# Altium PCB PCB1.PcbDoc
Units mm, origin at the board's own origin, x right, y up, seen from the top; angles counter-clockwise.
Board outline 200.01 x 161.89 mm, 2 copper layers (Top Layer, Bottom Layer); 51 components, 72 nets, 338 pads, 344 vias.
Unrouted connection lines stored in the file: 61.
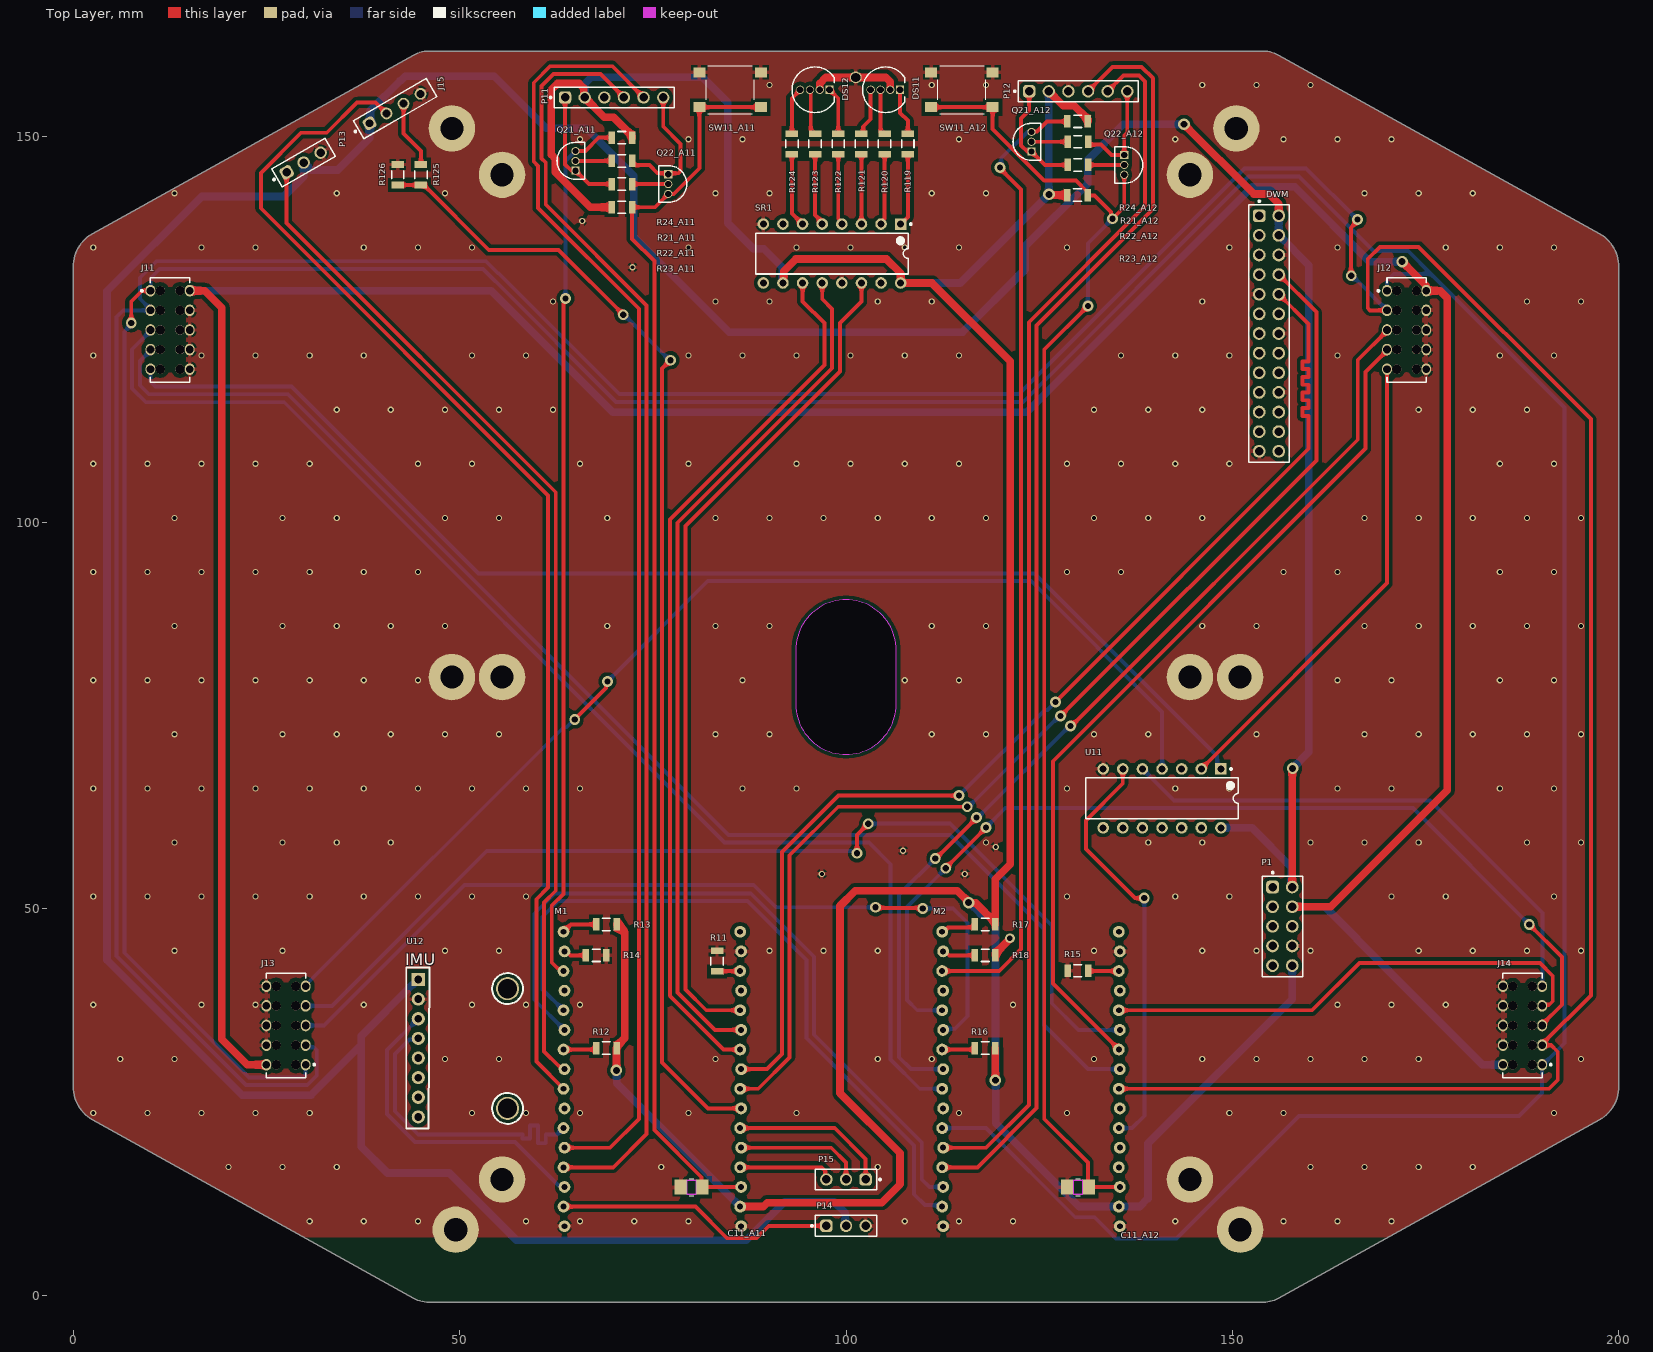
[diagram p0: Top Layer view]
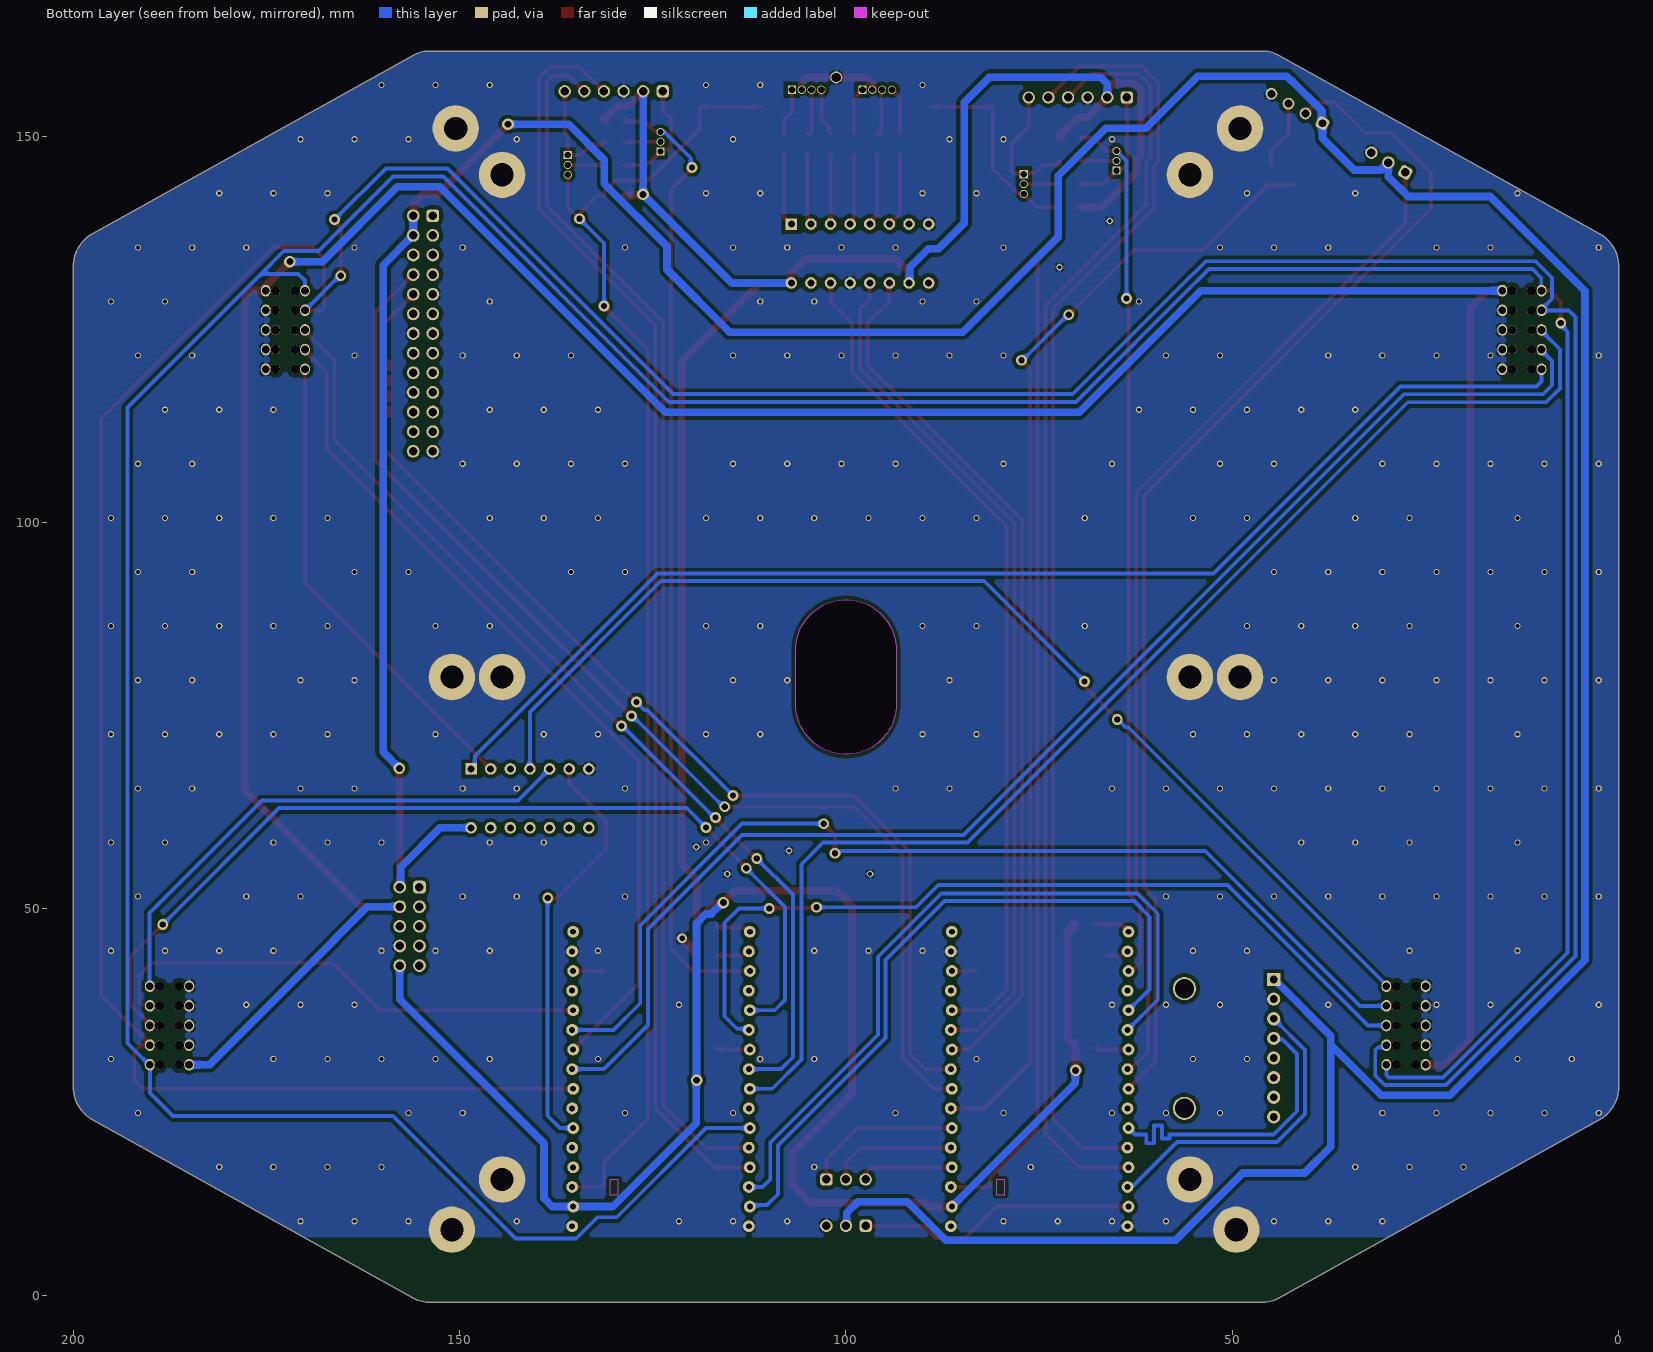
[diagram p1: Bottom Layer view, seen from below]
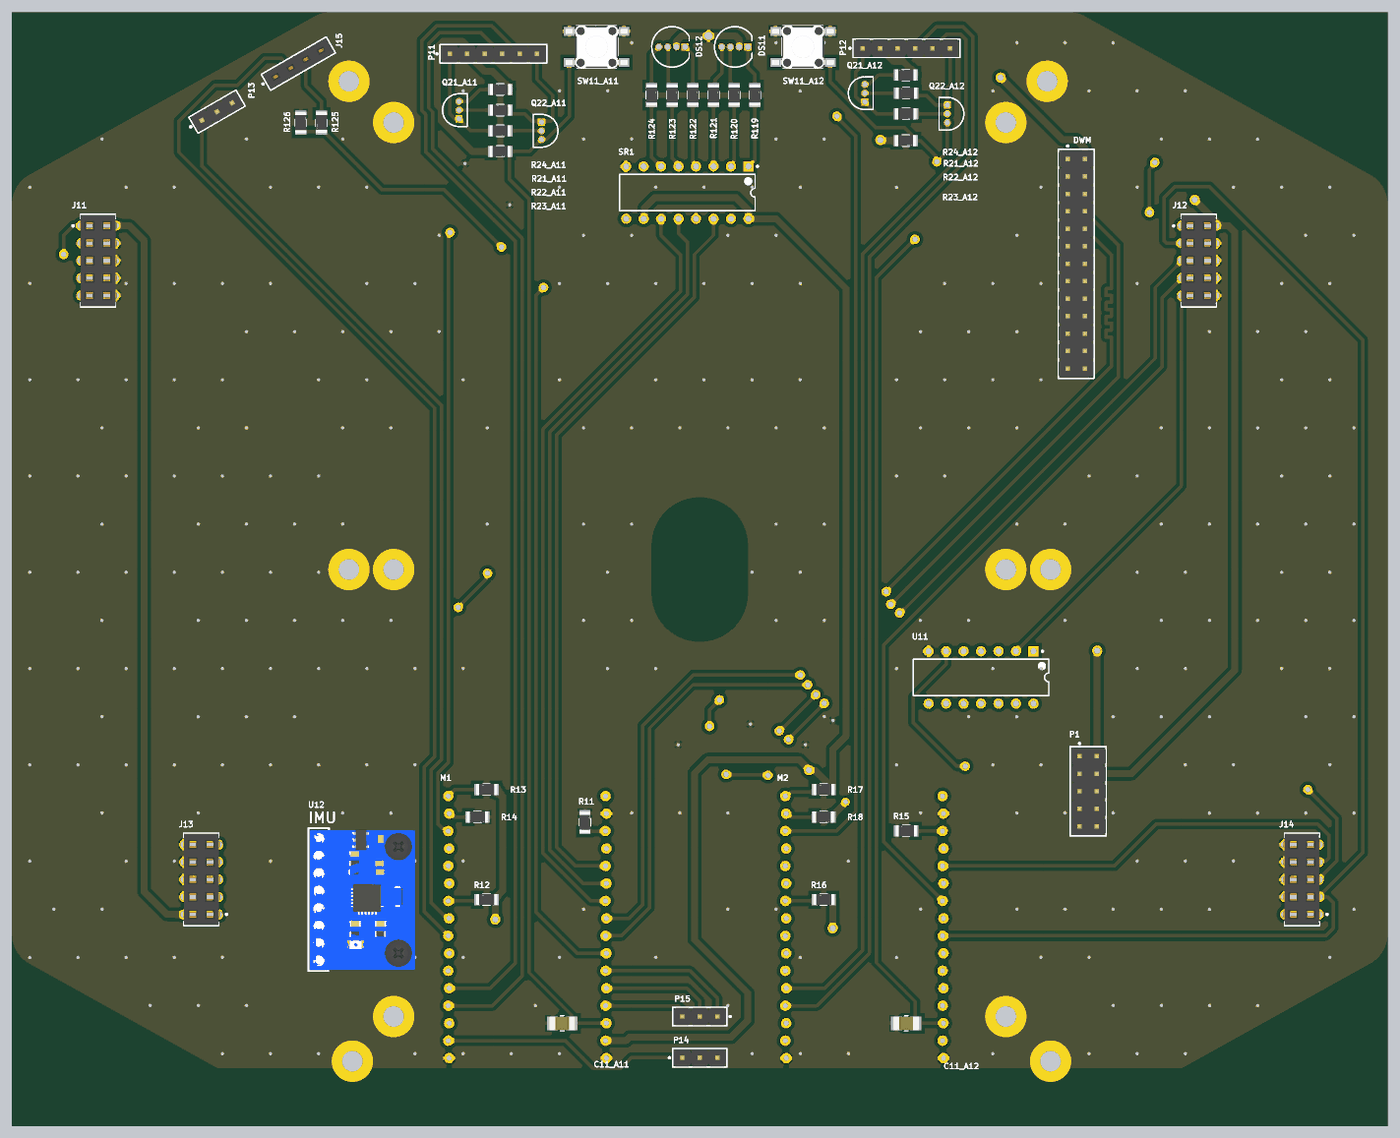
[diagram p2: 3D render of the assembled board from above, using the file's embedded part models]

## Layer stack, top to bottom
Top Solder: solder mask 0.0102, Solder Resist, Dk 3.5
Top Layer: signal copper 0.0356
Dielectric 1: dielectric 0.32, FR-4, Dk 4.8
Bottom Layer: signal copper 0.0356
Bottom Solder: solder mask 0.0102, Solder Resist, Dk 3.5

## Board outline
2.501,22.718 44.037,-0.354 ccw(c46.037,3.11) 46.037,-0.89 153.976,-0.889 ccw(c153.976,3.111) 155.976,-0.354 197.505,22.724 ccw(c195.005,27.054) 200.005,27.054 200.004,27.054 200.004,133.056 ccw(c195.004,133.056) 197.504,137.386 155.971,160.46 ccw(c153.971,156.996) 153.971,160.996 46.04,161 ccw(c46.04,157) 44.04,160.464 2.492,137.386 ccw(c4.992,133.056) -0.008,133.056 -0.006,133.056 0.001,27.048 ccw(c5.001,27.048)
cut-out: 93.5,76.5 ccw(c100,76.5) 100,70 ccw(c100,76.5) 106.5,76.5 106.5,83.5 ccw(c100,83.5) 100,90 ccw(c100,83.5) 93.5,83.5

## Design rules (kind name [scope] priority, off if disabled: settings)
Clearance [All] p1: gap=0.5 ignorepadtopadclearanceinfootprint=FALSE
PlaneConnect [All] p1: planeconnectstyle=Relief reliefexpansion=0.5 reliefentries=4 reliefconductorwidth=0.5 reliefairgap=0.254
PolygonConnect "PolygonConnect MOUNT" [IsPad AND ((AsMM(PadXSize_AllLayers) > 5) OR (AsMM(PadYSize_AllLayers) > 5)) vs InNet('GND')] p1: connectstyle=Direct reliefconductorwidth=0.5 reliefentries=4 polygonreliefangle="90 Angle" airgapwidth=0
PolygonConnect PolygonConnect_1 [All] p2: connectstyle=Relief reliefconductorwidth=0.5 reliefentries=4 polygonreliefangle="90 Angle" airgapwidth=0.254
RoutingVias [All] p1: holewidth=0.711 width=1.27 viastyle="Through Hole" minholewidth=0.711 minwidth=1.27 maxholewidth=0.711 maxwidth=1.27
SolderMaskExpansion [All] p1: expansion=0.102 istentingtop=FALSE
SupplyNets "Schematic Supply Nets_3" [InNet('+3V3')] p1: voltage=0.000
SupplyNets "Schematic Supply Nets_2" [InNet('VBAT')] p2: voltage=0.000
SupplyNets "Schematic Supply Nets_1" [InNet('GND')] p3: voltage=0.000
SupplyNets "Schematic Supply Nets" [InNet('+5')] p4: voltage=0.000
Width Width_power [InNetClass('PWR')] p1: maxlimit=1 minlimit=1 preferedwidth=1
Width Width_1 [All] p2: maxlimit=0.5 minlimit=0.5 preferedwidth=0.5
29 further rules are at their usual default settings.

## Classes and differential pairs
net class PWR: +3V3 +5 GND VBAT
channel class Autoprog: A11 A12
component class Moderkort: DS11 DS12 DWM J11 J12 J13 J14 J15 M1 M2 P1 P11 P12 P13 P14 P15 R11 R12 R13 R14 R15 R16 R17 R18 R119 R120 R121 R122 R123 R124 R125 R126 SR1 U11 U12
component class A12: C11_A12 Q21_A12 Q22_A12 R21_A12 R22_A12 R23_A12 R24_A12 SW11_A12
component class A11: C11_A11 Q21_A11 Q22_A11 R21_A11 R22_A11 R23_A11 R24_A11 SW11_A11

## Components (designator, comment, footprint, x,y, rotation, side; value= is the part's Value field where it differs from the comment)
C11_A11 "1 µF" "1 µF" 80,14 r0 top (schematic designator C11)
C11_A12 "1 µF" "1 µF" 130,14 r0 top (schematic designator C11)
DS11 "WP154A4SUREQBFZGC" KING-WP154A4SUREQBFZGC_V 105.095,156 r270 top
DS12 "WP154A4SUREQBFZGC" KING-WP154A4SUREQBFZGC_V 95.965,156 r270 top
DWM "DWM 1001 DEV" "DWM-1001 DEV" 136.061,124.841 r270 top
J11 "61301025721" 61301025721 12.54,124.92 r270 top locked
J12 "61301025721" 61301025721 172.54,124.92 r270 top locked
J13 "61301025721" 61301025721 27.54,34.92 r90 top locked
J14 "61301025721" 61301025721 187.54,34.92 r90 top locked
J15 "61300411821" 61300411821 41.648,153.568 r30 top
M1 "ESP32 Breakout" "ESP32 Breakout" 75,28 r180 top locked
M2 "ESP32 Breakout" "ESP32 Breakout" 124,28 r180 top locked
P1 "61301021121" 61301021121 156.464,47.752 r270 top
P11 "61300611121" 61300611121 70,155 r0 top
P12 "61300611121" 61300611121 130.048,155.804 r0 top
P13 "61300311121" 61300311121 29.82,146.583 r30 top
P14 "61300311121" 61300311121 100,9 r0 top locked
P15 "61300311121" 61300311121 100,15 r180 top
Q21_A11 "2N3904BU" FAIR-TO-92 65,145.53 r90 top (schematic designator Q21)
Q21_A12 "2N3904BU" FAIR-TO-92 124,148 r90 top (schematic designator Q21)
Q22_A11 "2N3904BU" FAIR-TO-92 77,145.07 r270 top (schematic designator Q22)
Q22_A12 "2N3904BU" FAIR-TO-92 136,147.54 r270 top (schematic designator Q22)
R11 "RT1206BRD07470RL" FP-RT1206-IPC_C 83.312,43.256 r90 top value=10k
R12 "RT1206BRD07470RL" FP-RT1206-IPC_C 69,32 r180 top value=10k
R13 "RT1206BRD07470RL" FP-RT1206-IPC_C 69,48 r180 top value=10k
R14 "RT1206BRD07470RL" FP-RT1206-IPC_C 67.673,44 r0 top value=10k
R15 "RT1206BRD07470RL" FP-RT1206-IPC_C 130,42 r180 top value=10k
R16 "RT1206BRD07470RL" FP-RT1206-IPC_C 118,32 r180 top value=10k
R17 "RT1206BRD07470RL" FP-RT1206-IPC_C 118,48 r180 top value=10k
R18 "RT1206BRD07470RL" FP-RT1206-IPC_C 118,44 r0 top value=10k
R21_A11 "RT1206BRD07470RL" FP-RT1206-IPC_C 71,146.8 r180 top value=10k (schematic designator R21)
R21_A12 "RT1206BRD07470RL" FP-RT1206-IPC_C 130,149.27 r180 top value=10k (schematic designator R21)
R22_A11 "RT1206BRD07470RL" FP-RT1206-IPC_C 71,143.8 r0 top value=10k (schematic designator R22)
R22_A12 "RT1206BRD07470RL" FP-RT1206-IPC_C 130,146.27 r0 top value=10k (schematic designator R22)
R23_A11 "RT1206BRD07470RL" FP-RT1206-IPC_C 71,140.8 r0 top value=10k (schematic designator R23)
R23_A12 "RT1206BRD07470RL" FP-RT1206-IPC_C 129.946,142.367 r0 top value=10k (schematic designator R23)
R24_A11 "RT1206BRD07470RL" FP-RT1206-IPC_C 71,149.8 r180 top value=10k (schematic designator R24)
R24_A12 "RT1206BRD07470RL" FP-RT1206-IPC_C 129.972,151.917 r180 top value=10k (schematic designator R24)
R119 "RT1206BRD07470RL" FP-RT1206-IPC_C 108,149 r90 top value=270
R120 "RT1206BRD07470RL" FP-RT1206-IPC_C 105,149 r90 top value=180
R121 "RT1206BRD07470RL" FP-RT1206-IPC_C 102,149 r90 top value=180
R122 "RT1206BRD07470RL" FP-RT1206-IPC_C 99,149 r90 top value=270
R123 "RT1206BRD07470RL" FP-RT1206-IPC_C 96,149 r90 top value=180
R124 "RT1206BRD07470RL" FP-RT1206-IPC_C 93,149 r90 top value=180
R125 "RT1206BRD07470RL" FP-RT1206-IPC_C 45,145 r270 top value=1k
R126 "RT1206BRD07470RL" FP-RT1206-IPC_C 42,145 r90 top value=2k
SR1 "SN74HC595N" N0016A 98.19,134.81 r270 top
SW11_A11 "430182050816" 430182050816 85,156 r0 top (schematic designator SW11)
SW11_A12 "430182050816" 430182050816 115,156 r0 top (schematic designator SW11)
U11 "SN74LS20N" N0014A 140.894,64.313 r270 top
U12 "MCU6050 breakout board" PCBComponent_1 51,32 r0 top

## Footprints (in the part's own frame and the unit in brackets; to place one, negate y for a bottom-side part, rotate by r counter-clockwise, add the part's x,y. Pads: shape width x height; smd on the part's side, far side on the other; paste and mask are expansions set on the pad)
"1 µF" [mm]
  rect 1.606x1.95 smd paste+0 mask+0: 1(-1.403,0) 2(1.403,0)
  Top Layer keep-out region: -0.549,-0.924 -0.549,0.924 0.549,0.924 0.549,-0.924
  Keep-Out Layer region: -0.549,-0.975 -0.549,0.975 0.549,0.975 0.549,-0.975
  silkscreen extent -0.29,-1.1 0.29,1.1, body extent -1.85,-0.97 1.85,0.97, height 1.85
61300311121 [mm] "Pin Header, pitch 2.54 mm, THT, Vertical, single row, 3p"
  rrect50% 1.6x1.6 hole 1.1: 1(-2.54,0)
  round 1.6 hole 1.1: 2(0,0) 3(2.54,0)
  silkscreen extent -4.53,-1.35 3.96,1.35, body extent -3.81,-1.27 3.81,1.27, height 8.57
61300411821 [mm] "Socket Header, Pitch 2.54 mm, THT, Vertical, single row, 4p"
  rrect50% 1.52x1.52 hole 1.02: 1(-3.81,0)
  round 1.52 hole 1.02: 2(-1.27,0) 3(1.27,0) 4(3.81,0)
  silkscreen extent -6.06,-1.35 5.46,1.35, body extent -5.33,-1.25 5.33,1.25, height 8.55
61300611121 [mm] "Pin Header, pitch 2.54 mm, THT, Vertical, single row, 6p"
  rrect50% 1.6x1.6 hole 1.1: 1(-6.35,0)
  round 1.6 hole 1.1: 2(-3.81,0) 3(-1.27,0) 4(1.27,0) 5(3.81,0) 6(6.35,0)
  silkscreen extent -8.34,-1.35 7.77,1.35, body extent -7.62,-1.27 7.62,1.27, height 8.57
61301021121 [mm] "Pin Header, pitch 2.54 mm, THT, Vertical, dual row, 10p"
  rrect50% 1.65x1.65 hole 1.1: 1(-5.08,-1.27)
  round 1.65 hole 1.1: 2(-5.08,1.27) 3(-2.54,-1.27) 4(-2.54,1.27) 5(0,-1.27) 6(0,1.27) 7(2.54,-1.27) 8(2.54,1.27) 9(5.08,-1.27) 10(5.08,1.27)
  silkscreen extent -7.08,-2.62 6.5,2.62, body extent -6.35,-2.54 6.35,2.54, height 8.59
61301025721 [mm] "Dual Socket Header Bottom Entry, pitch 2.54mm, 10p"
  oval 1.5x1.25 hole 1: 1(-5.08,-2.54) 2(-5.08,2.54) 3(-2.54,-2.54) 4(-2.54,2.54) 5(0,-2.54) 6(0,2.54) 7(2.54,-2.54) 8(2.54,2.54) 9(5.08,-2.54) 10(5.08,2.54)
  round 1.2 hole 1.2 unplated: MH1(-5.08,-1.27) MH2(-5.08,1.27) MH3(-2.54,-1.27) MH4(-2.54,1.27) MH5(0,-1.27) MH6(0,1.27) MH7(2.54,-1.27) MH8(2.54,1.27) MH9(5.08,-1.27) MH10(5.08,1.27)
  silkscreen extent -6.75,-3.77 6.75,2.54, body extent -6.65,-2.66 6.65,2.67, height 5.05
430182050816 [mm] "SMD Tact Switch, body 6x6mm"
  rect 1.55x1.3 smd: A1(-3.975,2.25) A2(3.975,2.25) B1(-3.975,-2.25) B2(3.975,-2.25)
  silkscreen extent -3.1,-3.1 3.1,3.1, body extent -4.5,-3.1 4.5,3.1, height 5
"DWM-1001 DEV" [mm] "Pin Header, pitch 2.54 mm, THT, Vertical, dual row, 26p"
  rrect50% 1.65x1.65 hole 1.1: 1(-14.859,17.399)
  round 1.65 hole 1.1: 2(-14.859,19.939) 3(-12.319,17.399) 4(-12.319,19.939) 5(-9.779,17.399) 6(-9.779,19.939) 7(-7.239,17.399) 8(-7.239,19.939) 9(-4.699,17.399) 10(-4.699,19.939) 11(-2.159,17.399) 12(-2.159,19.939) 13(0.381,17.399) 14(0.381,19.939) 15(2.921,17.399) 16(2.921,19.939) 17(5.461,17.399) 18(5.461,19.939) 19(8.001,17.399) 20(8.001,19.939) 21(10.541,17.399) 22(10.541,19.939) 23(13.081,17.399) 24(13.081,19.939) 25(15.621,17.399) 26(15.621,19.939)
  silkscreen extent -16.86,16.05 17.04,21.28, body extent -16.13,16.13 16.89,21.21, height 8.59
"ESP32 Breakout" [mil]
  round 60 hole 30: 1(-450,750) 2(-445,650) 3(-450,550) 4(-445,450) 5(-450,350) 6(-445,250) 7(-450,150) 8(-445,50) 9(-450,-50) 10(-445,-150) 11(-450,-250) 12(-445,-350) 13(-450,-450) 14(-445,-550) 15(-450,-650) 16(-445,-750) 23(455,-750) 24(450,-650) 25(455,-550) 26(450,-450) 27(455,-350) 28(450,-250) 29(455,-150) 30(450,-50) 31(455,50) 32(450,150) 33(455,250) 34(450,350) 35(455,450) 36(450,550) 37(455,650) 38(450,750)
FAIR-TO-92 [mm] "TO, 3-Leads, Body Dia 4.79mm, Pitch 1.27mm"
  rect 1.05x1.05 hole 0.8 mask+0.05: 1(0,0)
  round 1.05 hole 0.8 mask+0.05: 2(1.27,0) 3(2.54,0)
  silkscreen extent -1.11,-1.21 3.65,2.4, body extent -1.11,-1.21 3.65,2.4, height 5.33
FP-RT1206-IPC_C [mm]
  rect 0.858x1.612 smd paste+0 mask+0: 1(-1.327,0) 2(1.327,0)
  silkscreen extent -0.52,-0.8 0.52,0.8, body extent -1.86,-0.95 1.86,0.95, height 0.25
KING-WP154A4SUREQBFZGC_V [mm] "THD, 4-Leads, Dia 5.9mm, Pitch 1.27mm"
  rect 1.07x1.07 hole 0.889 paste-2539.97: 1(0,1.905)
  round 1.07 hole 0.889 paste-2539.97: 2(0,0.635) 3(0,-0.635) 4(0,-1.905)
  silkscreen extent -2.95,-2.95 2.95,2.5
N0014A [mm] "DIP, 14-Leads, Body 19.7x6.6mm, Pitch 2.54mm"
  rect 1.5x1.5 hole 0.9: 1(-3.81,7.62)
  round 1.5 hole 0.9: 2(-3.81,5.08) 3(-3.81,2.54) 4(-3.81,0) 5(-3.81,-2.54) 6(-3.81,-5.08) 7(-3.81,-7.62) 8(3.81,-7.62) 9(3.81,-5.08) 10(3.81,-2.54) 11(3.81,0) 12(3.81,2.54) 13(3.81,5.08) 14(3.81,7.62)
  silkscreen extent -3.93,-9.85 2.65,9.85, body extent -3.95,-9.85 3.95,9.85, height 5.08
N0016A [mm] "DIP, 16-Leads, Body 19.7x6.6mm, Pitch 2.54mm"
  rect 1.5x1.5 hole 0.9: 1(-3.81,8.89)
  round 1.5 hole 0.9: 2(-3.81,6.35) 3(-3.81,3.81) 4(-3.81,1.27) 5(-3.81,-1.27) 6(-3.81,-3.81) 7(-3.81,-6.35) 8(-3.81,-8.89) 9(3.81,-8.89) 10(3.81,-6.35) 11(3.81,-3.81) 12(3.81,-1.27) 13(3.81,1.27) 14(3.81,3.81) 15(3.81,6.35) 16(3.81,8.89)
  silkscreen extent -3.93,-9.85 2.65,10.32, body extent -3.95,-9.85 3.95,9.85, height 5.08
PCBComponent_1 [mm]
  rect 1.7x1.7 hole 1: 1(-6.347,8.876)
  round 1.7 hole 1: 2(-6.347,6.336) 3(-6.347,3.796) 4(-6.347,1.256) 5(-6.347,-1.284) 6(-6.347,-3.824) 7(-6.347,-6.364) 8(-6.347,-8.904)
  round 3 hole 2.5: ""(5.203,-7.804) ""(5.203,7.696)
  silkscreen extent -7.9,-10.4 7.2,10.4, body extent -7.65,-10.2 7.6,10.17, height 14.67

## Part data
C11_A11 C11_A12: library part CMP-001-00197-1, "SMD Auto X7R Flex, Ceramic, 1 uF, 20%, 25 VDC, X7R, SMD, MLCC, FT-CAP, Automotive Grade, 1206", Manufacturer_Name=Kemet, Manufacturer_Part_Number=C1206X105M3RACAUTO, Component Type=Standard, Copyright="Copyright (C) 2025 Ultra Librarian. All rights reserved.", Design Item ID="1 µF", Pins=2, Source=1MicroF.SchLib
DS11 DS12: library part CMP-2000-07415-1, "Full Color LED Lamp, Dominant Wavelength RGB 630 / 525 / 465 nm, -40 to 85 degC, 4-Pin THD, RoHS", Color=Red,Green,Blue(RGB), Current - Test=20mA, Manufacturer=Kingbright, Millicandela Rating=1300mcdRed,1700mcdGreen,900mcdBlue, Package / Case=Radial-4Leads, Package Description="4-Pin Through Hole LED, Dia 5.9 mm, Pitch 1.27 mm", Standard Package=500, Voltage - Forward (Vf) (Typ)=1.9VRed,3.3VGreen,3.3VBlue, 3D Model="WP154A4SUREQBFZGW.sldprt /  / WP154A4SUREQBFZGW.pro /  / WP154A4SUREQBFZGW.igs /  / WP154A4SUREQBFZGW.stp", Category=Optoelectronics, Datasheet URL=https://www.kingbrightusa.com/images/catalog/spec/WP154A4SUREQBFZGC.pdf, Datasheet Version="Rev. 5A, 08/2014", Family=LEDIndication-Discrete, Height=8.60mm, Lens Style/Size=RoundwithDomedTop,5mm,T-13/4, Lens Type=Clear, Manufacturer URL=http://www.kingbright.com/, Mounting Technology=ThroughHole, Mounting Type=ThroughHole, Online Catalog=5mm,T-13/4(RGB)RoundwithDomedTopLEDLamp, Other Names="754-1615 / WP154A4SUREQBFZGC-ND", Package Reference=WP154A4SUREQBFZGC, Packaging=Bulk, Viewing Angle=50°, Wavelength - Dominant=630nm,525nm,465nm, Wavelength - Peak=645nm,515nm,460nm
J11 J12 J13 J14: library part CMP-1502-01335-4, "THT Vertical Socket Header WR-PHD, Pitch 2.54 mm, Dual Row, 10 pins", Contact Resistance=20mΩ, Current Rating=3A, Operating Supply Voltage=250V, Gender=Female, Lead Pitch=2.54mm, Number of Pins=10, Orientation=Vertical
J15: library part CMP-1502-01316-4, "THT Vertical Socket Header WR-PHD, Pitch 2.54 mm, Single Row, 4 pins", Contact Resistance=20mΩ, Current Rating=3A, Operating Supply Voltage=250V, Gender=Female, Lead Pitch=2.54mm, Number of Pins=4, Orientation=Vertical
P1: library part CMP-002-00636-1, "WR-PHD Pin Header, THT, Vertical, pitch 2.54mm, 2 Row, 10P", Contact Resistance=20mOhm, Manufacturer="Wurth Elektronik", Operating Temperature Max=105°C, Operating Temperature Min=-40°C, Rated Current=3A, Withstanding Voltage=500V, Working Voltage=250V, Category="Board-to-Board Connectors", Component Type=Standard, ComponentLink1Description="Website Link", ComponentLink1URL=https://www.we-online.com/redexpert/article/61301021121?ad, ComponentLink2Description="Datasheet Link", ComponentLink2URL=https://www.we-online.com/redexpert/spec/61301021121?ad, Design Item ID=61301021121, Gender="Pin Header", Manufacturer Part Number=61301021121, Match Code=WR-PHD, Mount="Through Hole", Number of Rows=2, Orientation=Vertical, Packaging=Bag, Pin Count=10, Pins=10, Pitch=2.54mm, Source=WR-PHD.SchLib
P11 P12: library part CMP-1502-01070-4, "THT Vertical Pin Header WR-PHD, Pitch 2.54 mm, Single Row, 6 pins", Color=Black, Contact Resistance=20mΩ, Current Rating=3A, Max Operating Temperature=105°C, Min Operating Temperature=-40°C, Operating Supply Voltage=250V, Connector Type="Male Pin", Contact Gender=Male, Contact Material=Gold, Contact Mating Length=5.9944mm, Contact Plating=Gold, Gender=Male, Height=8.89mm, Housing Material=PBT, Lead Free="Lead Free", Lead Pitch=2.54mm, Mount="Through Hole", Number of Contacts=6, Number of Pins=6, Number of Positions=6, Number of Rows=1, Orientation=Vertical, Packaging=Bulk, Pitch=2.54mm, RoHS=Compliant, Termination="Through Hole", Voltage Rating=250V
P13 P14 P15: library part CMP-1502-01062-4, "THT Vertical Pin Header WR-PHD, Pitch 2.54 mm, Single Row, 3 pins", Color=Black, Contact Resistance=20mΩ, Current Rating=3A, Max Operating Temperature=105°C, Min Operating Temperature=-40°C, Operating Supply Voltage=250V, Connector Type="Male Pin", Contact Material=Gold, Contact Mating Length=5.9944mm, Contact Plating=Gold, Gender=Male, Height=8.94mm, Lead Free="Lead Free", Lead Pitch=2.54mm, Mount="Through Hole", Number of Contacts=3, Number of Pins=3, Number of Positions=3, Number of Rows=1, Orientation=Vertical, Packaging=Bulk, Pitch=2.54mm, RoHS=Compliant, Termination=Solder, Voltage Rating=250V
Q21_A11 Q21_A12 Q22_A11 Q22_A12: library part CMP-2000-04944-1, "NPN General-Purpose Amplifier, 40 V VCEO, 0.2 A, -55 to 150 degC, 2-Pin TO-92, RoHS, Bulk", Manufacturer=FairchildSemiconductor, Maximum Collector Base Voltage=60V, Maximum Collector Emitter Saturation Voltage=0.2@1mA@10mA, Maximum Collector Emitter Voltage=40V, Maximum DC Collector Current=0.2A, Maximum Operating Frequency=300(Min)MHz, Maximum Power Dissipation=625mW, Minimum DC Current Gain=40@0.1mA@1V, Operating Temperature=-55to150degC, Package=3TO-92, Package Description="3-Pin Transistor Outline Package, Body Dia 4.79 mm, Pitch 1.27 mm", Package Reference=TO-92, Category=GPBJT, Datasheet URL=https://datasheet.ciiva.com/4722/2n3904-82270-4722369.pdf, Datasheet Version="Rev. 1.1.0, 10/2014", Manufacturer URL=https://www.fairchildsemi.com/, Mounting=ThroughHole, Packaging=Bulk, Pin Count=3, Rad Hard=No, Type=NPN
R11 R12 R13 R14 R15 R16 R17 R18 R21_A11 R21_A12 R22_A11 R22_A12 R23_A11 R23_A12 R24_A11 R24_A12 R119 R120 R121 R122 R123 R124 R125 R126: library part CMP-009-00218-1, "Fixed Resistor, Thin Film, 0.25W, 470ohm, 200V, 0.1% +/-Tol, 25ppm/Cel, Surface Mount, 1206", Case/Package=1206, Max Operating Temperature=155°C, Min Operating Temperature=-55°C, Package Height=0.55mm, Package Length=3.1mm, Package Width=1.6mm, Power=250mW, Rated Temperature=70°C, Resistor Type="FIXED RESISTOR", Temperature Coefficient (ppm/Cel)=25, Tolerance=0.1%, Working Voltage=200V, Additional Feature="HIGH PRECISION", Construction=Chip, Mounting Technology="Surface Mount", Packaging="Tape and Reel", Pins=2, Reach SVHC Compliant=Yes, RoHS Compliant=Yes, Technology="THIN FILM", Termination=Wraparound
SR1: library part CMP-0780-00137-3, "8-Bit Shift Registers With 3-State Output Registers, N0016A, TUBE", F @ Nom Voltage(Max)(Mhz)=28, Generic Part Number=SN74HC595, ICC @ Nom Voltage(Max)(mA)=0.08, Manufacturer="Texas Instruments", Operating Temperature Range(C)="-40 to 85", Rating=Military, tpd @ Nom Voltage(Max)(ns)=34, Voltage(Nom)(V)=6, 3-State Output=Yes, Bits=8, Code_JEDEC=MS-001, DatasheetVersion=SCLS041H, Input Type=CMOS, Output Drive (IOL/IOH)(Max)(mA)=7.8/-7.8, Output Type=CMOS, PackageReference=N0016A, PackageVersion=http://www.ti.com/lit/ml/mpdi002c/mpdi002c.pdf, Technology Family=HC, VCC(Max)(V)=6, VCC(Min)(V)=2
SW11_A11 SW11_A12: library part CMP-1452-00014-10, "Switch Tactile N.O. SPST Round Button Gull Wing 0.05A 12VDC 1000000Cycles 1.57N SMD Reel", Color=Black, Contact Current Rating=50mA, Contact Resistance=100mΩ, Insulation Resistance=100MΩ, Max Operating Temperature=85°C, Min Operating Temperature=-40°C, Voltage Rating=12V, Actuator Length=1.6mm, Actuator Material="Liquid Crystal Polymer, Polymer", Contact Material="Stainless Steel, Steel", Contact Plating=Silver, Current Rating=50mA, Diameter=3.5mm, Height=5mm, Illumination Type="Illuminated, Non-Illuminated", Lead Free="Lead Free", Length=6.2mm, Life (Cycles)=1Mcycles, Mechanical Life=1Mcycles, Mount="Surface Mount", Packaging="Tape and Reel", REACH SVHC=No, RoHS=Compliant, Switch Function=Off-Mom, Switch Travel=250µm, Termination="Gull Wing", Throw Configuration=SPST, Voltage Rating (DC)=12V, Width=6.2mm
U11: library part CMP-1627-00458-2, "Dual 4-input positive-NAND gates, N0014A, TUBE", F @ Nom Voltage(Max)(Mhz)=35, Generic Part Number=SN74LS20, ICC @ Nom Voltage(Max)(mA)=0.011, Manufacturer="Texas Instruments", Operating Temperature Range(C)="0 to 70", Rating=Catalog, tpd @ Nom Voltage(Max)(ns)=22, Voltage(Nom)(V)=5, Bits(#)=2, Code_JEDEC=MS-001, DatasheetVersion=SDLS079, Input Type=TTL, Output Drive (IOL/IOH)(Max)(mA)=0.4/-16, Output Type=TTL, PackageReference=N0014A, Schmitt Trigger=No, Technology Family=LS, VCC(Max)(V)=5.25, VCC(Min)(V)=4.75
U12: library part IMU

## Free pads (board coordinates)
  round 1.524 hole 1.2: 3(101.272,157.6)
  round 6 hole 3 mask+0: ""(49,80) ""(49,151) ""(49.5,8.5) ""(55.5,15) ""(55.5,80) ""(55.5,145) ""(144.5,80) ""(144.5,15) ""(144.5,145) ""(150.5,151) ""(151,8.5) ""(151,80)

## Via types
v1: diameter 0.8, hole 0.5, Top Layer to Bottom Layer, tented both sides, 310 vias
v2: diameter 1.4, hole 0.8, Top Layer to Bottom Layer, 26 vias
v3: diameter 1.5, hole 0.9, Top Layer to Bottom Layer, 7 vias
v4: diameter 1.27, hole 0.711, Top Layer to Bottom Layer, 1 vias

## Nets (pads, with @x,y where several pads share a name; then routed paths per layer and width w, separated by ;. In a path a pad name is that pad's centre, name@x,y a point inside that pad or via, vN(x,y) a via of type N, cw(c..) or ccw(c..) an arc to the next point about the centre after c; other vN are vias at no path point)
+3V3: M1.2 M2.2 P1.10 P11.2 P12.2 R12.1 R13.1 R16.1 R17.1 R23_A11.1 R23_A12.1 R24_A11.1 R24_A12.1 SR1.10 SR1.16 | length 466.1
  Top Layer w1: R23_A11.1@69.602,140.796 66.925,140.796 62.4,145.321 62.4,147.085 61.85,147.635 61.85,155.98 62.67,156.8 65.489,156.8 66.075,156.214 66.075,155.115 P11.2 66.19,154.994 68.731,152.454 69.908,152.454 72.327,150.035 R24_A11.1 ; v3(70.282,29.108) 70.304,29.131 70.304,31.977 R12.1 ; R13.1 70.398,47.929 70.398,47.694 70.633,47.694 71.374,46.953 71.374,33.282 R12.1@70.398,32.306 ; M1.2 89.29,11.49 89.8,12 104.6,12 107,14.4 107,18.4 99.222,26.178 99.222,50.378 101.209,52.364 114.409,52.364 115.875,50.898 v3(115.875,50.825) 115.926,50.774 116.788,50.774 R17.1@119.327,48.235 ; SR1.10 91.936,131.096 91.936,132.525 93.497,134.087 105.232,134.087 107.08,132.239 SR1.16 111.113,131 121.26,120.853 121.26,55.778 119.327,53.846 R17.1@119.327,48.235 ; R16.1 119.328,31.999 v3(119.329,27.838) v3(119.329,27.838) ; R17.1 R17.1@119.327,48.235 ; P12.2 126.238,155.798 128.122,153.914 129.537,153.914 131.299,152.153 R24_A12.1 ; v3(126.263,142.469) 126.336,142.469 126.438,142.367 R23_A12.1
  Bottom Layer w1: P11.2 66.19,156.766 67.056,157.632 81.432,157.632 84.709,154.356 84.709,138.76 88.036,135.433 89.357,135.433 91.744,133.046 91.744,131.096 SR1.10 ; v3(70.282,29.108) 70.333,29.057 70.333,27.46 M1.2 ; SR1.16 114.795,131 v3(126.263,142.469) 126.251,142.481 126.251,155.791 P12.2 ; v3(115.875,50.825) 115.948,50.825 117.414,49.36 118.128,49.36 119.329,48.158 v3(119.329,27.838) 119.381,27.787 119.381,22.275 130.166,11.49 M2.2 138.007,11.49 139.065,12.548 139.065,19.66 157.734,38.329 P1.10
+5: DWM.2 DWM.4 J15.1 P1.2 P13.2 P14.2 U11.14 U12.1 | length 535.2
  Top Layer w1: v3@143.79,151.485 152.756,142.519 154.711,142.519 156,141.231 DWM.2 ; P1.2 157.734,68.148 v3(157.785,68.199)
  Bottom Layer w1: U12.1 43.963,40.186 43.887,40.186 37.26,33.559 37.26,32.408 ; P14.2 99.885,9.115 99.885,10.681 98.45,12.116 92.088,12.116 87.109,7.137 57.363,7.137 48.671,15.829 40.671,15.829 37.26,19.24 37.26,32.408 ; v3(143.739,151.536) 135.89,151.536 131.267,146.914 131.267,143.84 123.165,135.738 123.165,132.74 115.062,124.638 84.912,124.638 72.549,137.001 72.549,144.849 66.37,151.028 61.214,151.028 54.483,157.759 42.951,157.759 42.367,157.175 42.301,157.175 38.438,153.312 38.438,151.753 J15.1 38.349,149.731 34.236,145.618 30.785,145.618 P13.2 29.82,144.755 27.254,142.189 16.637,142.189 4.369,129.921 4.369,43.409 21.869,25.908 30.759,25.908 37.26,32.408 ; U11.14 152.527,60.503 157.61,55.42 157.61,52.956 P1.2 ; DWM.2 DWM.4 156.041,137.16 159.893,133.308 159.893,70.307 v3(157.785,68.199)
"BOOT A11": M1.25 Q21_A11.3 R24_A11.2 | length 113.6
  Top Layer w0.5: M1.25 63.166,41.97 62.803,42.333 62.667,42.333 61.931,43.069 61.931,50.431 63.443,51.943 63.443,128.264 63.531,128.352 63.531,128.834 v2(63.703,129.007) ; Q21_A11.3 66.27,148.07 68,149.8 R24_A11.2
  Bottom Layer w0.5: v2(63.703,129.007) 63.703,146.773 Q21_A11.3
"BOOT A12": M2.25 Q21_A12.3 R24_A12.2 | length 125.5
  Top Layer w0.5: M2.25 119.821,41.97 122.657,44.806 122.657,143.095 119.939,145.812 v2(119.939,145.923) ; Q21_A12.3 124.078,150.618 124.725,150.618 126,151.893 128.494,151.893 128.673,152.072 R24_A12.2@128.673,152.27
  Bottom Layer w0.5: v2(119.939,145.923) 120.086,146.07 120.086,147.159 123.472,150.545 Q21_A12.3@123.8,150.545
CRANE_SERV: M1.37 P14.1 | length 36.3
  Top Layer w0.5: M1.37 80.51,11.49 84.562,7.438 88.438,7.438 90,9 P14.1
"DRV_DIR 1": J11.7 M2.9 | length 175.9
  Bottom Layer w0.5: J11.7 10,122.255 8.625,120.88 8.625,117.765 9.788,116.602 27.786,116.602 84.802,59.586 113.464,59.586 125.619,47.431 125.619,34.985 131.334,29.27 M2.9
"DRV_DIR 2": J12.7 M2.10 | length 112
  Top Layer w0.5: M2.10 126.771,40.342 126.771,69.113 167.234,109.576 167.234,119.489 170,122.255 J12.7
"DRV_DIR 3": J13.7 M2.11 | length 133.7
  Top Layer w0.5: v2(101.422,57.201) 101.422,59.588 v2(102.87,61.036)
  Bottom Layer w0.5: J13.7 33.472,37.46 53.512,57.5 100.679,57.5 100.806,57.373 101.25,57.373 v2(101.422,57.201) ; v2(102.87,61.036) 113.462,61.036 126.619,47.879 126.619,37.795 130.064,34.35 M2.11
"DRV_DIR 4": J14.7 M2.12 | length 64.3
  Top Layer w0.5: M2.12 160.316,36.89 166.426,43 189.8,43 191.455,41.345 191.455,38.055 191,37.6 190.22,37.6 J14.7
DRV_DRVDIS: J11.3 J12.3 J13.3 J14.3 M2.8 | length 519.6
  Top Layer w0.5: M2.8 190.941,26.73 192.1,27.889 192.1,31.521 191.242,32.38 J14.3 190.08,32.505 196.377,38.802 196.377,113.376 174.092,135.661 169.088,135.661 167.513,134.087 167.513,127.753 167.806,127.46 J12.3 ; v2(165.379,131.928) 165.329,131.978 165.329,138.145 166.168,138.985 v2(166.168,139.193)
  Bottom Layer w0.5: J11.3 6.48,127.46 5.624,126.604 5.624,123.146 5.624,43.922 22.342,27.203 30.287,27.203 31.521,28.438 31.521,31.75 31.16,32.111 30.426,32.111 30.158,32.38 J13.3 ; J11.3@10,127.523 10,127.585 8.625,128.96 8.625,131.673 10.769,133.817 53.424,133.817 54.991,132.25 55.031,132.25 70.66,116.621 122.361,116.621 151.562,145.821 159.54,145.821 v2(166.168,139.193) ; v2(165.379,131.928) 165.518,131.928 169.986,127.46 J12.3
DRV_EN: J11.1 J12.1 J13.1 J14.1 M2.33 | length 524.2
  Top Layer w0.5: v2(7.518,125.832) 7.518,128.626 8.893,130 J11.1
  Bottom Layer w0.5: v2(7.518,125.832) 7.518,125.588 6.625,124.695 6.625,44.334 22.756,28.203 29.787,28.203 30.08,28.496 J13.1 ; J11.1 10.033,130.033 10.033,131.667 11.183,132.817 53.01,132.817 54.576,131.25 54.617,131.25 70.246,115.621 122.936,115.621 152.095,144.78 158.623,144.78 168.262,135.141 172.757,135.141 175.717,132.182 ; M2.33 118.126,21.65 129.667,10.109 132.133,10.109 134.901,7.341 142.748,7.341 158.598,23.19 187.071,23.19 190.08,26.199 J14.1 ; J12.1 170,131.307 170.875,132.182 175.717,132.182 ; J14.1@190.48,30.118 192.989,32.627 192.989,114.91 175.717,132.182
"DRV_ERR 1": J11.9 U11.1 | length 161.5
  Bottom Layer w0.5: J11.9 10,118.27 10.668,117.602 28.245,117.602 52.426,93.421 124.376,93.421 148.014,69.783 148.014,68.623 U11.1
"DRV_ERR 2": J12.9 U11.2 | length 61.7
  Top Layer w0.5: U11.2 145.974,68.143 170,92.17 J12.9
"DRV_ERR 3": J13.9 U11.4 | length 147.4
  Top Layer w0.5: v2(64.893,74.5) 68.967,78.574 68.967,79.279 v2(69.139,79.451)
  Bottom Layer w0.5: J13.9 30.08,40.125 63.472,73.517 63.825,73.517 64.809,74.5 v2(64.893,74.5) ; v2(69.139,79.451) 82.109,92.421 123.961,92.421 140.894,75.489 U11.4
"DRV_ERR 4": J14.9 U11.5 | length 69
  Bottom Layer w0.5: U11.5 142.434,64.043 175.557,64.043 190.119,49.481 190.119,40.039 J14.9
DRV_ERR_SUM: M2.6 U11.6 | length 54.7
  Top Layer w0.5: U11.6 135.814,66.243 131.039,61.468 131.039,57.761 137.4,51.4 v2(138.6,51.4)
  Bottom Layer w0.5: M2.6 137.017,21.65 138.608,23.241 138.608,51.392 v2(138.6,51.4)
"DRV_PWM 1": J11.5 M2.31 | length 165.7
  Bottom Layer w0.5: J11.5 9.755,124.675 9.755,124.55 7.625,122.42 7.625,117.351 9.406,115.57 27.305,115.57 84.289,58.586 102.958,58.586 105.766,55.778 105.766,30.514 109.549,26.73 M2.31
"DRV_PWM 2": J12.5 M2.30 | length 126.9
  Top Layer w0.5: v2(111.557,56.54) 111.633,56.54 116.871,61.779 v2(116.871,61.818) ; v2(129.057,73.685) 129.184,73.685 166.218,110.719 166.218,121.013 170,124.795 J12.5
  Bottom Layer w0.5: v2(111.557,56.54) 106.874,51.857 106.874,30.82 108.423,29.27 M2.30 ; v2(116.871,61.818) 117.05,61.818 128.918,73.685 v2(129.057,73.685)
"DRV_PWM 3": J13.5 M2.28 | length 111.1
  Top Layer w0.5: v2(103.835,50.216) 103.911,50.14 109.855,50.14 v2(109.931,50.063)
  Bottom Layer w0.5: J13.5 32.456,34.92 50.622,53.086 88.062,53.086 90.932,50.216 v2(103.835,50.216) ; v2(109.931,50.063) 113.843,50.063 115.697,48.209 115.697,36.119 114.082,34.504 112.724,34.504 M2.28
"DRV_PWM 4": J14.5 M2.27 | length 125.1
  Top Layer w0.5: v2(112.903,55.27) 112.903,55.308 118.11,60.515 v2(118.11,60.554) ; v2(188.4,48) 192.634,43.766 192.634,37.599 190.08,35.045 J14.5
  Bottom Layer w0.5: M2.27 109.211,36.89 107.874,38.227 107.874,50.241 v2(112.903,55.27) ; v2(118.11,60.554) 120.599,63.043 173.357,63.043 v2(188.4,48)
DS11_B: R120.1 SR1.2 | length 9.2
  Top Layer w0.5: SR1.2 104.54,138.891 105,139.351 R120.1
DS11_G: R121.1 SR1.3 | length 9.1
  Top Layer w0.5: SR1.3 R121.1
DS11_R: R119.1 SR1.1 | length 9.4
  Top Layer w0.5: SR1.1 108,139.54 R119.1
DS12_B: R123.1 SR1.5 | length 9.4
  Top Layer w0.5: R123.1 96,139.811 96.92,138.891 SR1.5
DS12_G: R124.1 SR1.6 | length 9.6
  Top Layer w0.5: R124.1 93,140 SR1.6
DS12_R: R122.1 SR1.4 | length 9.2
  Top Layer w0.5: R122.1 99,139.351 99.46,138.891 SR1.4
"DTR A11": P11.1 Q21_A11.1 R22_A11.1 | length 15.5
  Top Layer w0.5: P11.1 63.65,146.347 64.472,145.525 Q21_A11.1@64.8,145.525 ; Q21_A11.1 66.73,143.8 R22_A11.1
"DTR A12": P12.1 Q21_A12.1 R22_A12.1 | length 14.5
  Top Layer w0.5: P12.1 123.698,153.324 122.657,152.283 122.657,148.81 123.467,148 Q21_A12.1 125.73,146.27 R22_A12.1
DWM_RXD: DWM.10 M1.9 | length 149.9
  Top Layer w0.5: M1.9 89.763,29.27 91.71,31.217 91.71,57.361 99.017,64.668 v2(114.63,64.668) ; v2(127.107,76.789) 159.858,109.541 159.858,113.551 159.858,113.801 159.072,113.801 159.072,114.809 159.858,114.809 159.858,115.817 159.072,115.817 159.072,116.825 159.858,116.825 159.858,117.833 159.072,117.833 159.072,118.841 159.858,118.841 159.858,119.849 159.072,119.849 159.072,120.857 159.858,120.857 159.858,121.2 159.858,125.682 DWM.10
  Bottom Layer w0.5: v2(114.63,64.668) 125.727,75.765 126.08,75.765 127.105,76.789 v2(127.107,76.789)
DWM_TXD: DWM.8 M1.8 | length 149.6
  Top Layer w0.5: M1.8 88.638,26.73 92.71,30.802 92.71,56.947 98.996,63.233 v2(115.698,63.233) ; v2(127.769,74.948) 160.858,108.038 160.858,127.222 DWM.8
  Bottom Layer w0.5: v2(115.698,63.233) 115.876,63.233 127.591,74.948 v2(127.769,74.948)
GND: C11_A11.1 C11_A12.1 DS11.2 DS12.2 DWM.6 DWM.9 DWM.14 DWM.20 DWM.25 J11.4 J11.6 J11.8 J11.10 J12.4 J12.6 J12.8 J12.10 J13.4 J13.6 J13.8 J13.10 J14.4 J14.6 J14.8 J14.10 J15.4 M1.1 M1.15 M1.38 M2.1 M2.15 M2.38 P1.8 P11.3 P12.3 P13.3 P14.3 pad. pad.3 R11.2 R14.2 R15.2 R18.2 R126.2 SR1.8 SR1.13 SW11_A11.A1 SW11_A11.A2 SW11_A12.A1 SW11_A12.A2 U11.7 U12.2 | length 14.5
  Top Layer w1: DS12.2 96.6,156.8 97.4,157.6 105.144,157.6 105.73,157.014 DS11.2 ; R18.2 119.327,44.235 121.148,46.056 121.148,46.148 v4(121.2,46.2)
  other v1: 30.6,9.6 37.6,9.6 44.6,9.6 58.6,9.6 65.6,9.6 72.6,9.6 79.6,9.6 107.6,9.6 114.6,9.6 121.6,9.6 142.6,9.6 156.6,9.6 163.6,9.6 170.6,9.6 20.1,16.6 27.1,16.6 34.1,16.6 76.1,16.6 104.1,16.6 160.1,16.6 167.1,16.6 174.1,16.6 181.1,16.6 2.6,23.6 9.6,23.6 16.6,23.6 23.6,23.6 30.6,23.6 51.6,23.6 58.6,23.6 65.6,23.6 79.6,23.6 93.6,23.6 114.6,23.6 128.6,23.6 149.6,23.6 156.6,23.6 191.6,23.6 6.1,30.6 13.1,30.6 48.1,30.6 55.1,30.6 83.1,30.6 104.1,30.6 111.1,30.6 132.1,30.6 146.1,30.6 153.1,30.6 160.1,30.6 167.1,30.6 174.1,30.6 195.1,30.6 2.6,37.6 16.6,37.6 23.6,37.6 37.6,37.6 51.6,37.6 58.6,37.6 65.6,37.6 121.6,37.6 163.6,37.6 170.6,37.6 177.6,37.6 13.1,44.6 27.1,44.6 48.1,44.6 55.1,44.6 90.1,44.6 97.1,44.6 104.1,44.6 132.1,44.6 146.1,44.6 153.1,44.6 160.1,44.6 174.1,44.6 181.1,44.6 188.1,44.6 195.1,44.6 2.6,51.6 9.6,51.6 16.6,51.6 23.6,51.6 30.6,51.6 37.6,51.6 44.6,51.6 51.6,51.6 58.6,51.6 128.6,51.6 142.6,51.6 149.6,51.6 170.6,51.6 177.6,51.6 191.6,51.6 96.87,54.536 115.37,54.536 107.37,57.536 119.37,58.036 13.1,58.6 27.1,58.6 34.1,58.6 41.1,58.6 118.1,58.6 139.1,58.6 146.1,58.6 160.1,58.6 167.1,58.6 174.1,58.6 188.1,58.6 195.1,58.6 2.6,65.6 9.6,65.6 16.6,65.6 23.6,65.6 30.6,65.6 37.6,65.6 44.6,65.6 51.6,65.6 58.6,65.6 65.6,65.6 86.6,65.6 93.6,65.6 128.6,65.6 142.6,65.6 149.6,65.6 163.6,65.6 170.6,65.6 184.6,65.6 191.6,65.6 13.1,72.6 27.1,72.6 34.1,72.6 41.1,72.6 48.1,72.6 55.1,72.6 83.1,72.6 90.1,72.6 111.1,72.6 118.1,72.6 132.1,72.6 139.1,72.6 153.1,72.6 167.1,72.6 174.1,72.6 181.1,72.6 188.1,72.6 195.1,72.6 2.6,79.6 9.6,79.6 16.6,79.6 23.6,79.6 30.6,79.6 37.6,79.6 44.6,79.6 86.6,79.6 107.6,79.6 114.6,79.6 163.6,79.6 170.6,79.6 184.6,79.6 191.6,79.6 13.1,86.6 27.1,86.6 34.1,86.6 41.1,86.6 48.1,86.6 69.1,86.6 83.1,86.6 90.1,86.6 111.1,86.6 118.1,86.6 146.1,86.6 153.1,86.6 167.1,86.6 174.1,86.6 181.1,86.6 188.1,86.6 195.1,86.6 2.6,93.6 9.6,93.6 16.6,93.6 23.6,93.6 30.6,93.6 37.6,93.6 44.6,93.6 128.6,93.6 135.6,93.6 156.6,93.6 163.6,93.6 184.6,93.6 191.6,93.6 13.1,100.6 27.1,100.6 34.1,100.6 48.1,100.6 55.1,100.6 69.1,100.6 83.1,100.6 90.1,100.6 97.1,100.6 104.1,100.6 111.1,100.6 118.1,100.6 132.1,100.6 139.1,100.6 146.1,100.6 167.1,100.6 174.1,100.6 181.1,100.6 188.1,100.6 195.1,100.6 2.6,107.6 9.6,107.6 16.6,107.6 23.6,107.6 30.6,107.6 44.6,107.6 51.6,107.6 65.6,107.6 79.6,107.6 93.6,107.6 100.6,107.6 107.6,107.6 114.6,107.6 128.6,107.6 135.6,107.6 142.6,107.6 149.6,107.6 184.6,107.6 191.6,107.6 34.1,114.6 41.1,114.6 48.1,114.6 55.1,114.6 62.1,114.6 132.1,114.6 139.1,114.6 146.1,114.6 174.1,114.6 181.1,114.6 188.1,114.6 2.6,121.6 16.6,121.6 23.6,121.6 30.6,121.6 37.6,121.6 51.6,121.6 58.6,121.6 79.6,121.6 86.6,121.6 93.6,121.6 100.6,121.6 107.6,121.6 114.6,121.6 135.6,121.6 142.6,121.6 149.6,121.6 163.6,121.6 184.6,121.6 191.6,121.6 62.1,128.6 83.1,128.6 90.1,128.6 104.1,128.6 111.1,128.6 146.1,128.6 188.1,128.6 195.1,128.6 72.37,133.036 2.6,135.6 16.6,135.6 23.6,135.6 37.6,135.6 44.6,135.6 51.6,135.6 79.6,135.6 93.6,135.6 100.6,135.6 107.6,135.6 114.6,135.6 128.6,135.6 149.6,135.6 163.6,135.6 177.6,135.6 184.6,135.6 191.6,135.6 65.87,139.036 13.1,142.6 34.1,142.6 48.1,142.6 83.1,142.6 90.1,142.6 111.1,142.6 118.1,142.6 167.1,142.6 174.1,142.6 181.1,142.6 65.6,149.6 79.6,149.6 86.6,149.6 114.6,149.6 142.6,149.6 156.6,149.6 163.6,149.6 170.6,149.6 90.1,156.6 111.1,156.6 118.1,156.6 146.1,156.6 153.1,156.6 160.1,156.6
IMU_SCL: M1.36 U12.3 | length 40.9
  Bottom Layer w0.5: U12.3 40.589,31.732 40.589,28.069 40.589,28 40.589,23.483 44.244,19.828 57.172,19.828 62.774,14.226 63.374,14.226 M1.36
IMU_SDA: M1.33 U12.4 | length 40.3
  Bottom Layer w0.5: U12.4 44.513,33.116 43.53,33.116 41.656,31.242 41.656,23.83 44.658,20.828 56.929,20.828 58.124,20.828 58.124,20.29 59.132,20.29 59.132,21.965 60.14,21.965 60.14,19.682 61.148,19.682 61.148,20.828 61.398,20.828 62.621,20.828 M1.33
M1_RXD: M1.34 P11.5 | length 167.7
  Top Layer w0.5: M1.34 69.478,19.11 73.2,22.832 73.2,127.671 60.15,140.721 60.15,146.153 59.6,146.703 59.6,156.912 61.738,159.05 69.76,159.05 P11.5
M1_TXD: M1.35 P11.4 | length 166.4
  Top Layer w0.5: M1.35 69.885,16.57 74.2,20.885 74.2,128.086 61.15,141.136 61.15,146.568 60.6,147.118 60.6,156.498 62.152,158.05 68.22,158.05 P11.4
M2_RXD: M2.34 P12.5 | length 158.1
  Top Layer w0.5: M2.34 118.119,19.11 123.657,24.647 123.657,125.917 138.7,140.961 138.7,157.083 137.922,157.861 135.915,157.861 P12.5
M2_TXD: M2.35 P12.4 | length 165.2
  Top Layer w0.5: M2.35 116.993,16.57 124.657,24.233 124.657,125.503 139.7,140.546 139.7,143.315 139.7,157.497 138.244,158.953 134.468,158.953 P12.4
MTM_RXD: M1.27 M2.37 | length 91.8
  Bottom Layer w0.5: M1.27 60.731,39.602 60.731,48.997 62.754,51.019 87.258,51.019 94.869,43.409 94.869,33.317 108.8,19.386 108.8,13.086 110.2,11.686 112.247,11.686 M2.37
MTM_TXD: M1.28 M2.36 | length 95.1
  Bottom Layer w0.5: M1.28 59.665,38.255 59.665,49.378 62.306,52.019 87.673,52.019 95.869,43.823 95.869,33.731 109.8,19.8 109.8,15.014 110.784,14.03 M2.36
NetDS11_1: DS11.1 R119.2 | length 6.1
  Top Layer w0.5: DS11.1 107,153 108,152 R119.2
NetDS11_3: DS11.3 R120.2 | length 6.1
  Top Layer w0.5: DS11.3 104.46,150.506 104.639,150.327 R120.2
NetDS11_4: DS11.4 R121.2 | length 6.2
  Top Layer w0.5: R121.2 102.034,150.327 102.213,150.506 102.213,151.213 103.19,152.19 DS11.4
NetDS12_1: DS12.1 R122.2 | length 6.1
  Top Layer w0.5: DS12.1@97.905,156 99,154.905 R122.2
NetDS12_3: DS12.3 R123.2 | length 6.2
  Top Layer w0.5: DS12.3@95.365,156 95.444,155.921 95.444,150.506 95.623,150.327 R123.2
NetDS12_4: DS12.4 R124.2 | length 6.1
  Top Layer w0.5: R124.2 93,154.905 DS12.4@94.095,156
NetJ15_3: J15.3 R125.1 | length 8.8
  Top Layer w0.5: J15.3 42.748,150.343 45,148.091 R125.1
NetM1_4: M1.4 P15.3 | length 12.4
  Top Layer w0.5: M1.4 96.83,16.57 97.334,16.066 97.334,15.126 P15.3
NetM1_5: M1.5 P15.2 | length 16.6
  Top Layer w0.5: M1.5 98.09,19.11 100,17.2 P15.2
NetM1_6: M1.6 P15.1 | length 20.5
  Top Layer w0.5: M1.6 98.55,21.65 102.54,17.66 P15.1
NetM1_14: M1.14 R11.1 | length 3
  Top Layer w0.5: R11.1 83.332,41.95 86.283,41.95 M1.14
NetM1_23: M1.23 R13.2 | length 4.6
  Top Layer w0.5: M1.23 64.393,48 R13.2
NetM1_24: M1.24 R14.1 | length 3
  Top Layer w0.5: M1.24 63.847,44.51 64.357,44 R14.1
NetM1_29: M1.29 R12.2 | length 4.3
  Top Layer w0.5: M1.29 67.494,31.81 67.673,31.989 R12.2
NetM2_14: M2.14 R15.1 | length 4
  Top Layer w0.5: R15.1 131.357,41.97 M2.14
NetM2_23: M2.23 R17.2 | length 4.7
  Top Layer w0.5: M2.23 112.675,47.05 113.248,47.623 116.494,47.623 116.673,47.802 R17.2
NetM2_24: M2.24 R18.1 | length 4.3
  Top Layer w0.5: M2.24 112.847,44.51 113.357,44 R18.1
NetM2_29: M2.29 R16.2 | length 4.3
  Top Layer w0.5: M2.29 116.494,31.81 116.673,31.989 R16.2
NetQ21_A11_2: Q21_A11.2 R21_A11.2 | length 4.7
  Top Layer w0.5: Q21_A11.2 R21_A11.2
NetQ21_A12_2: Q21_A12.2 R21_A12.2 | length 4.7
  Top Layer w0.5: Q21_A12.2 R21_A12.2
NetQ22_A11_2: Q22_A11.2 R22_A11.2 | length 4.7
  Top Layer w0.5: R22_A11.2 Q22_A11.2
NetQ22_A12_2: Q22_A12.2 R22_A12.2 | length 4.7
  Top Layer w0.5: R22_A12.2 Q22_A12.2
"RESET A11": C11_A11.2 M1.3 Q22_A11.3 R23_A11.2 SW11_A11.B1 SW11_A11.B2 | length 162.2
  Top Layer w0.5: M1.3 81.433,14.03 C11_A11.2 81.299,14.104 81.299,15.286 75.209,21.375 75.209,133.821 72.327,136.704 R23_A11.2 75.27,140.8 Q22_A11.3 77.709,142.53 81.025,145.846 SW11_A11.B1 SW11_A11.B2
"RESET A12": C11_A12.2 M2.3 Q22_A12.3 R23_A12.2 SW11_A12.B1 SW11_A12.B2 | length 173.4
  Top Layer w0.5: SW11_A12.B1 SW11_A12.B2 118.975,150.914 125.643,144.247 129.771,144.247 131.273,142.744 R23_A12.2 131.3,142.34 132.16,142.34 134.305,140.195 134.305,139.465 v2(134.465,139.305) 136,140.84 Q22_A12.3 ; v2(131.293,128.016) 125.657,122.38 125.657,22.843 131.299,17.201 131.299,14.104 C11_A12.2 ; C11_A12.2@131.403,14.03 M2.3
  Bottom Layer w0.5: v2(131.293,128.016) 131.293,136.133 v2(134.465,139.305)
"RTS A11": P11.6 Q22_A11.1 R21_A11.1 | length 17.7
  Top Layer w0.5: R21_A11.1 72.327,146.423 72.506,146.244 74.556,146.244 75.6,145.2 78.307,145.2 78.6,145.493 78.6,149 76.35,151.25 P11.6
"RTS A12": P12.6 Q22_A12.1 R21_A12.1 | length 13.9
  Top Layer w0.5: R21_A12.1 131.327,149.072 131.506,148.893 133,148.893 134.353,147.54 Q22_A12.1 136,150.097 136.398,150.495 P12.6
SON_ECHO: M1.7 R125.2 R126.1 | length 148.7
  Top Layer w0.5: R126.1 R125.2 45.377,143.673 53.78,135.27 62.799,135.27 v2(71.171,126.898) ; v2(77.292,121.006) 76.209,119.923 76.209,30.14 82.16,24.19 M1.7
  Bottom Layer w0.5: v2(71.171,126.898) 71.285,126.898 77.178,121.006 v2(77.292,121.006)
SON_SERV: M1.30 P13.1 | length 132.4
  Top Layer w0.5: P13.1 27.62,138.742 62.443,103.919 62.443,52.357 60.931,50.845 60.931,31.569 62.831,29.669 62.894,29.669 63.293,29.27 M1.30
SON_TRIG: J15.2 M1.31 | length 156.6
  Top Layer w0.5: J15.2 39.126,154.356 36.728,154.356 32.817,150.444 29.489,150.444 24.282,145.237 24.282,140.665 61.443,103.505 61.443,52.771 59.931,51.259 59.931,30.242 M1.31
SR1_CLK: M1.10 SR1.11 | length 113.7
  Top Layer w0.5: M1.10 84.162,31.81 77.209,38.762 77.209,100.391 97.2,120.382 97.2,125.8 94.38,128.62 SR1.11
SR1_DATA: M1.12 SR1.14 | length 109.1
  Top Layer w0.5: M1.12 81.91,36.89 79.209,39.591 79.209,99.563 99.2,119.554 99.2,125.8 102,128.6 SR1.14
SR1_LATCH: M1.11 SR1.12 | length 110.9
  Top Layer w0.5: M1.11 83.036,34.35 78.209,39.176 78.209,99.977 98.2,119.968 98.2,127.625 96.92,128.905 SR1.12
VBAT: J11.2 J12.2 J13.2 J14.2 P1.4 | length 420.3
  Top Layer w1: J11.2 17.015,130 19.228,127.787 19.228,33.147 22.535,29.84 J13.2 ; P1.4 162.712,50.292 177.8,65.38 177.8,129.057 176.857,130 J12.2 175.08,130.634 v3(171.958,133.756)
  Bottom Layer w1: J11.2 54.099,130 69.825,114.275 123.393,114.275 152.552,143.434 158.064,143.434 167.742,133.756 v3(171.958,133.756) ; P1.4 161.976,50.292 166.116,46.152 166.116,46.076 182.352,29.84 J14.2
pads on no net: DWM.1 DWM.3 DWM.5 DWM.7 DWM.11 DWM.12 DWM.13 DWM.15 DWM.16 DWM.17 DWM.18 DWM.19 DWM.21 DWM.22 DWM.23 DWM.24 DWM.26 J11.MH1 J11.MH2 J11.MH3 J11.MH4 J11.MH5 J11.MH6 J11.MH7 J11.MH8 J11.MH9 J11.MH10 J12.MH1 J12.MH2 J12.MH3 J12.MH4 J12.MH5 J12.MH6 J12.MH7 J12.MH8 J12.MH9 J12.MH10 J13.MH1 J13.MH2 J13.MH3 J13.MH4 J13.MH5 J13.MH6 J13.MH7 J13.MH8 J13.MH9 J13.MH10 J14.MH1 J14.MH2 J14.MH3 J14.MH4 J14.MH5 J14.MH6 J14.MH7 J14.MH8 J14.MH9 J14.MH10 M1.13 M1.16 M1.26 M1.32 M2.4 M2.5 M2.7 M2.13 M2.16 M2.26 M2.32 P1.1 P1.3 P1.5 P1.6 P1.7 P1.9 SR1.7 SR1.9 SR1.15 U11.3 U11.8 U11.9 U11.10 U11.11 U11.12 U11.13 U12. U12.5 U12.6 U12.7 U12.8

## Polygon pours and split planes (outlines as drawn)
GND on Bottom Layer "GND_L02_P003" (solid, pour order 3): 2.501,22.718 44.037,-0.354 ccw(c46.037,3.11) 46.037,-0.89 153.976,-0.889 ccw(c153.976,3.111) 155.976,-0.354 197.505,22.724 ccw(c195.005,27.054) 200.005,27.054 200.004,27.054 200.004,133.056 ccw(c195.004,133.056) 197.504,137.386 155.971,160.46 ccw(c153.971,156.996) 153.971,160.996 46.04,161 ccw(c46.04,157) 44.04,160.464 2.492,137.386 ccw(c4.992,133.056) -0.008,133.056 -0.006,133.056 0.001,27.048 ccw(c5.001,27.048)
GND on Top Layer "GND_L01_P002" (solid, pour order 2): 2.501,22.718 44.037,-0.354 ccw(c46.037,3.11) 46.037,-0.89 153.976,-0.889 ccw(c153.976,3.111) 155.976,-0.354 197.505,22.724 ccw(c195.005,27.054) 200.005,27.054 200.004,27.054 200.004,133.056 ccw(c195.004,133.056) 197.504,137.386 155.971,160.46 ccw(c153.971,156.996) 153.971,160.996 46.04,161 ccw(c46.04,157) 44.04,160.464 2.492,137.386 ccw(c4.992,133.056) -0.008,133.056 -0.006,133.056 0.001,27.048 ccw(c5.001,27.048)

## Other copper
Multi-Layer:
  pour cut-out: 28,7.5 172.5,7.5 172.5,-3 166,-9.5 33.5,-9.5 29,-5

## Silkscreen, mask and mechanical layers (free items; w line width, h text height)
Mechanical 1:
  lines w0.254: -0.008,133.056 cw(c4.992,133.056) 2.492,137.386 44.04,160.464 cw(c46.04,157) 46.04,161 153.971,160.996 cw(c153.971,156.996) 155.971,160.46 197.504,137.386 cw(c195.004,133.056) 200.004,133.056 200.004,27.054 ; -0.006,133.056 0.001,27.048 ccw(c5.001,27.048) 2.501,22.718 44.037,-0.354 ccw(c46.037,3.11) 46.037,-0.89 153.976,-0.889 ccw(c153.976,3.111) 155.976,-0.354 197.505,22.724 ccw(c195.005,27.054) 200.005,27.054 ; 93.5,76.5 ccw(c100,76.5) 100,70 ccw(c100,76.5) 106.5,76.5 106.5,83.5 ccw(c100,83.5) 100,90 ccw(c100,83.5) 93.5,83.5 93.5,76.5

## Text inside footprints (layer, text, board x,y; h text height)
DWM: Mechanical 1 "DWM-1001 DEV" at 146.444,132.474 h1.52 r270
U12: Top Overlay "IMU" at 43,42.7 h1.52